# Altium PCB IRA.PcbDoc
Units mm, origin at the board's own origin, x right, y up, seen from the top; angles counter-clockwise.
Board outline 148 x 105 mm, 2 copper layers (Top Layer, Bottom Layer); 82 components, 62 nets, 302 pads, 34 vias.
Unrouted connection lines stored in the file: 1.
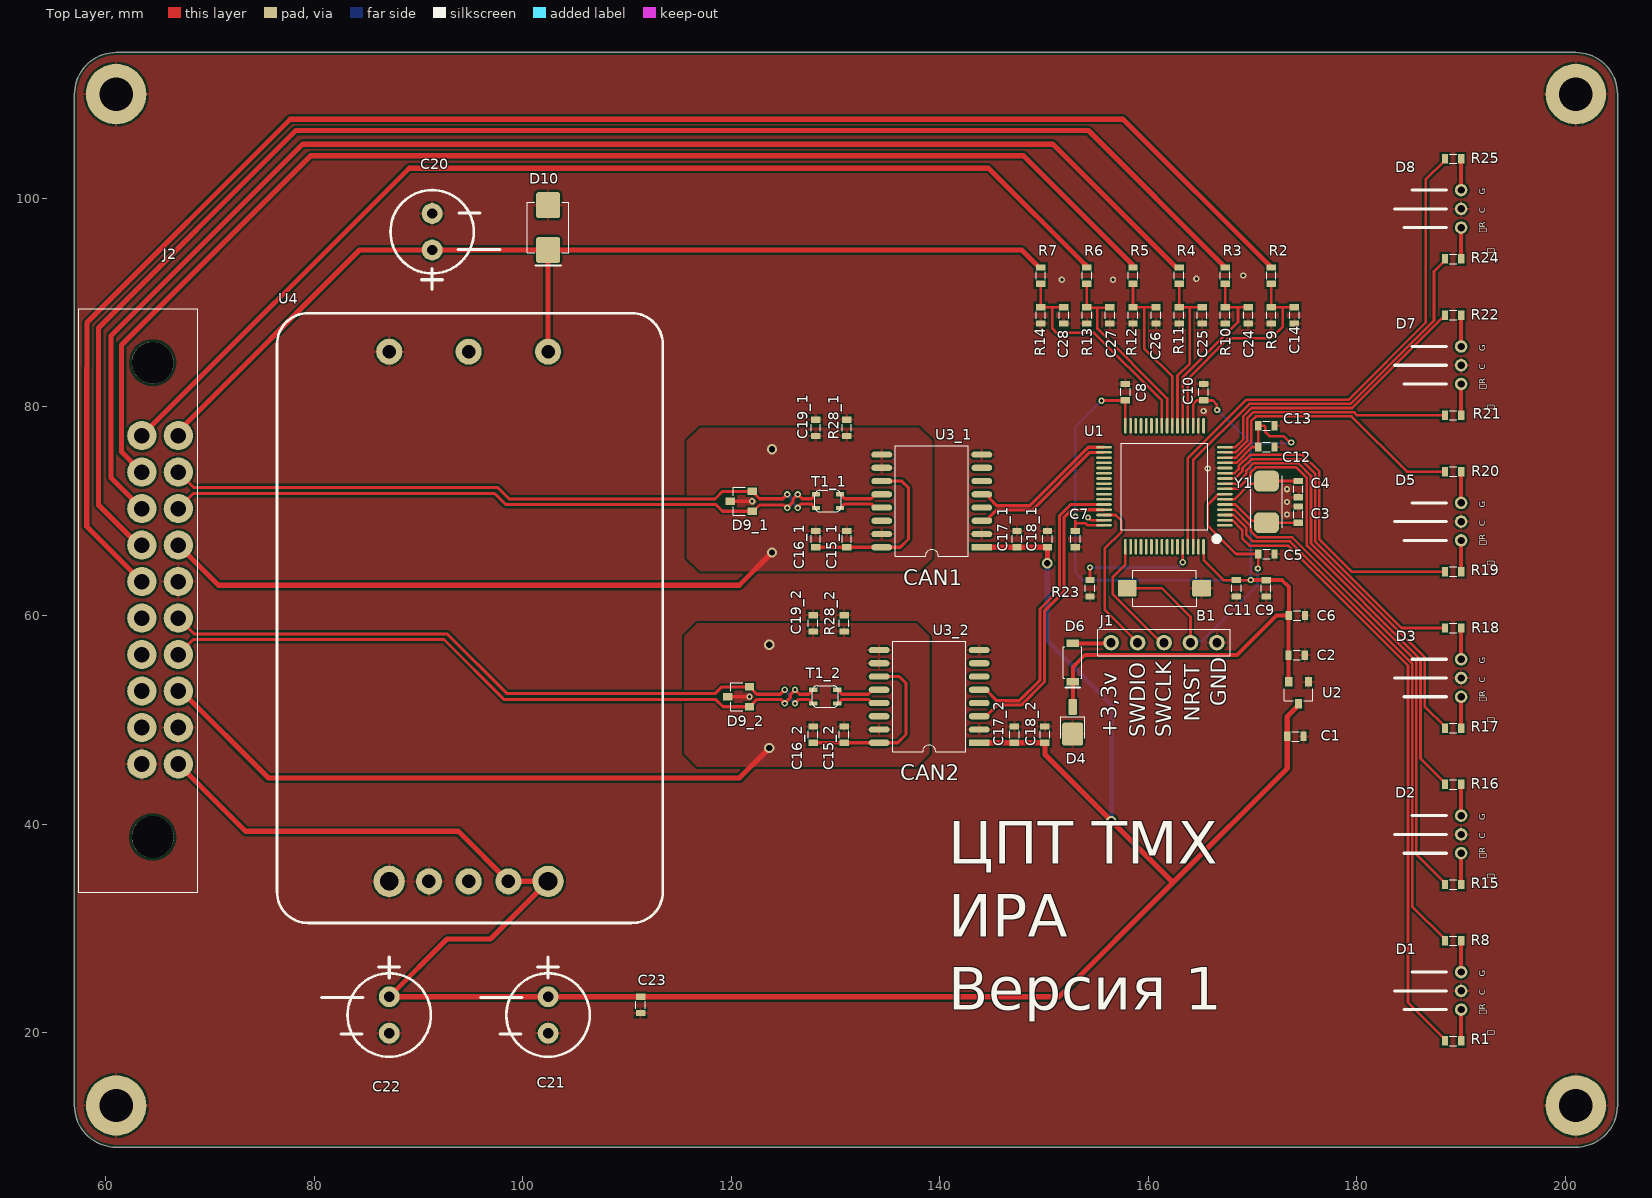
[diagram p0: Top Layer view]
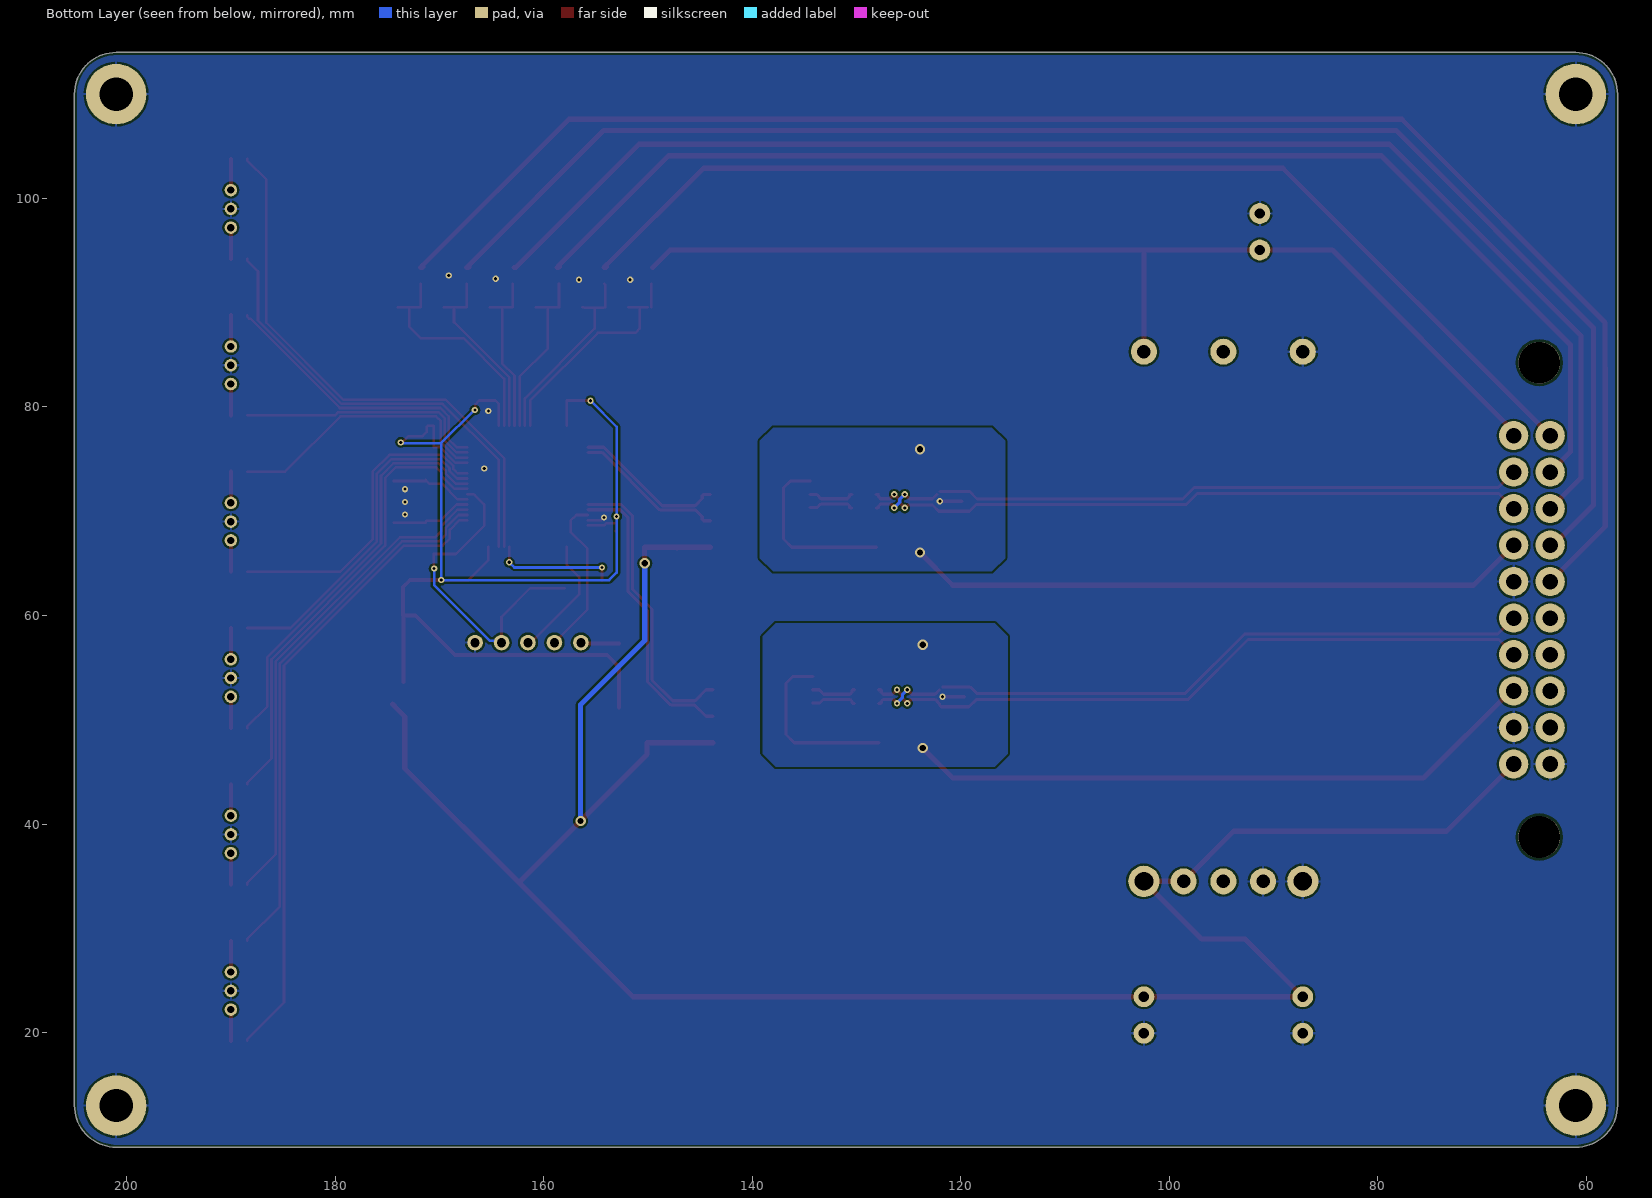
[diagram p1: Bottom Layer view, seen from below]
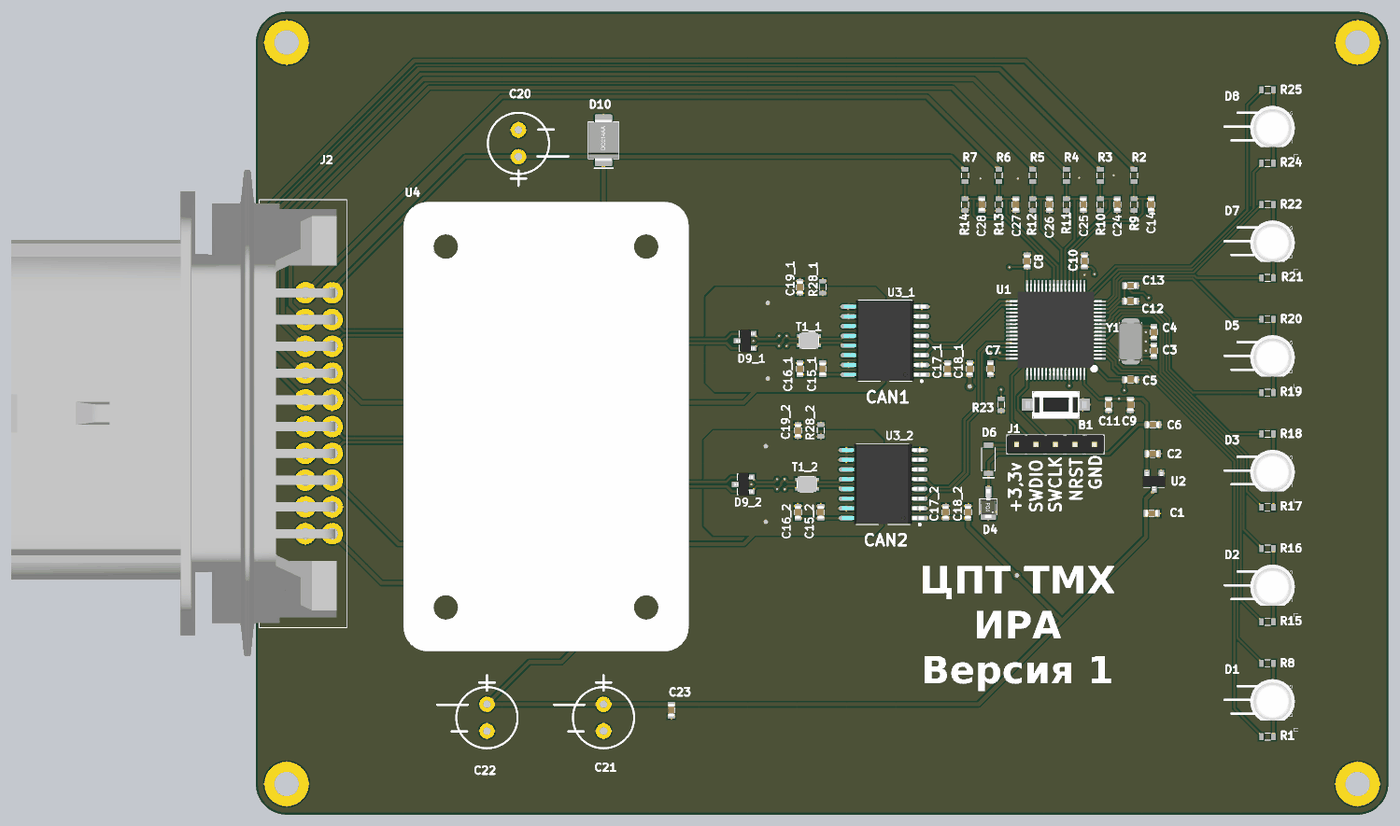
[diagram p2: 3D render of the assembled board from above, using the file's embedded part models]

## Layer stack, top to bottom
Top Solder: solder mask 0.0102, Solder Resist, Dk 3.5
Top Layer: signal copper 0.0356
Dielectric 1: dielectric 0.32, FR-4, Dk 4.8
Bottom Layer: signal copper 0.0356
Bottom Solder: solder mask 0.0102, Solder Resist, Dk 3.5

## Board outline
57,13 57,110 cw(c61,110) 61,114 201,114 cw(c201,110) 205,110 205,13 cw(c201,13) 201,9 61,9 cw(c61,13)

## Design rules (kind name [scope] priority, off if disabled: settings)
AcuteAngle [All] p1: minimum=3.50000000000000E+0001 checktracksonly=FALSE
BoardOutlineClearance "BoardOutlineClearance 1" [All] p1: gap=0.25 ignorepadtopadclearanceinfootprint=FALSE except(0: Arc-SplitContinuation Track-SplitContinuation SMDPad-SplitContinuation THPad-SplitContinuation Via-SplitContinuation Fill-SplitContinuation Poly-SplitContinuation Region-SplitContinuation Text-SplitContinuation) // Milling
Clearance "Clearance-1 1/2 Oz" [All] p1: gap=0.125 ignorepadtopadclearanceinfootprint=FALSE except(0.2: Arc-Fill Arc-Poly Track-Fill Track-Poly SMDPad-SMDPad SMDPad-Fill SMDPad-Poly THPad-Fill THPad-Poly Via-Fill Via-Poly Fill-Fill Fill-Poly Poly-Poly Poly-Region Poly-Text; 0.25: Arc-Hole Track-Hole SMDPad-Hole THPad-Hole Via-Hole Fill-Hole Poly-Hole Region-Hole Text-Hole) // Standart
ComponentClearance [All] p1: gap=0.1 collisioncheckmode=3 verticalgap=0.1 showdistances=FALSE
DiffPairsRouting "DiffPairsRouting 1/2 Oz" [All] p1: maxlimit=0.254 minlimit=0.125 mostfreqgap=0.254 toplayer_minwidth=0.125 toplayer_maxwidth=0.381 toplayer_prefwidth=0.381 bottomlayer_minwidth=0.125 bottomlayer_maxwidth=0.381 bottomlayer_prefwidth=0.381 maxuncoupledlength=12.7
HoleSize "Minimum HoleSize" [IsPad] p1: absolutevalues=TRUE maxlimit=5.9 minlimit=0.6 maxpercent=80.000 minpercent=20.000
HoleSize "Minimum HoleSize VIA 1" [IsVia] p2: absolutevalues=TRUE maxlimit=5.9 minlimit=0.3 maxpercent=80.000 minpercent=20.000 // Standart
HoleToHoleClearance Hole2HoleClearance [All] p1: gap=0.25 allowstackedmicrovias=FALSE
MinimumAnnularRing "Minimum AR VIA Standart" [All] p1: minimumring=0.15
MinimumAnnularRing "Minimum AR PAD Standart" [All] p2: minimumring=0.2
MinimumSolderMaskSliver "SolderMask Bridge Standart" [All] p1: minsoldermaskwidth=0.15 // All Masks
PlaneClearance "PlaneClearance-1 1/2 Oz" [All] p1: clearance=0.2 // Standart
PlaneConnect "TermalConnect-1 1/2 Oz" [All] p1: planeconnectstyle=Relief reliefexpansion=0.2 reliefentries=4 reliefconductorwidth=0.2 reliefairgap=0.2 // Standart
PolygonConnect "PolygonConnect-1 1/2 Oz" [All] p1: thpad.connectstyle=Relief thpad.reliefconductorwidth=0.254 thpad.reliefentries=4 thpad.polygonreliefangle="90 Angle" thpad.airgapwidth=0.2 smdpad.connectstyle=Relief smdpad.reliefconductorwidth=0.254 smdpad.reliefentries=4 smdpad.polygonreliefangle="90 Angle" smdpad.airgapwidth=0.2 via.connectstyle=Direct via.reliefconductorwidth=0.254 via.reliefentries=4 via.polygonreliefangle="90 Angle" via.airgapwidth=0.254 // Standart
RoutingCorners [All] p1 off: cornerstyle=45-Degree minsetback=2.54 maxsetback=2.54
RoutingVias [All] p1: holewidth=0.4 width=0.8 viastyle="Through Hole" minholewidth=0.3 minwidth=0.6 maxholewidth=5.9 maxwidth=8.9
SilkToSilkClearance Silk2SilkClearance [All] p1 off: silktosilkclearance=0.15
SilkToSolderMaskClearance Silk2SolderMaskClearance [IsPad] p1 off: minsilkscreentomaskgap=0.15 clearancetoexposedcopper=TRUE
SolderMaskExpansion SolderMaskExpansion-1 [All] p1: expansion=0.05 istentingtop=FALSE // Standart
UnRoutedNet [All] p1: checkbadconnections=TRUE
Width "Width 1/2 Oz" [All] p1: maxlimit=10 minlimit=0.125 preferedwidth=0.254 checkconnectedcopper=TRUE
19 further rules are at their usual default settings.

## Classes and differential pairs
channel class CAN: CAN1 CAN2
net class GND_CAN[1..2]: GND_CAN1 GND_CAN2
net class CAN_TX[1..2]: CAN_TX1 CAN_TX2
net class CAN_RX[1..2]: CAN_RX1 CAN_RX2
net class CAN_P[1..2]: CAN_P1 CAN_P2
net class CAN_N[1..2]: CAN_N1 CAN_N2
component class CAN2: C15_2 C16_2 C17_2 C18_2 C19_2 D9_2 R28_2 T1_2 U3_2
component class CAN1: C15_1 C16_1 C17_1 C18_1 C19_1 D9_1 R28_1 T1_1 U3_1
component class Main: C20 C21 C22 C23 D10 J2 U4
component class MCU: B1 C1 C2 C3 C4 C5 C6 C7 C8 C9 C10 C11 C12 C13 C14 C24 C25 C26 C27 C28 D1 D2 D3 D4 D5 D6 D7 D8 J1 R1 R2 R3 R4 R5 R6 R7 R8 R9 R10 R11 R12 R13 R14 R15 R16 R17 R18 R19 R20 R21 R22 R23 R24 R25 U1 U2 Y1

## Components (designator, comment, footprint, x,y, rotation, side; value= is the part's Value field where it differs from the comment)
B1 "But" "BUTTON 6x3.5" 165.106,62.611 r270 top
C1 "1uF" "0603 Capicator" 174.1,48.4 r180 top
C2 "1uF" "0603 Capicator" 174.23,56.2 r180 top
C3 "10pF" "0603 Capicator" 174.371,69.673 r90 top
C4 "10pF" "0603 Capicator" 174.371,72.113 r270 top
C5 "0.1uF" "0603 Capicator" 171.323,65.9 r0 top
C6 "4.7uF" "0603 Capicator" 174.25,60 r180 top
C7 "0.1uF" "0603 Capicator" 153,67.32 r90 top
C8 "0.1uF" "0603 Capicator" 157.794,81.425 r270 top
C9 "0.1uF" "0603 Capicator" 171.3,62.6 r90 top
C10 "0.1uF" "0603 Capicator" 165.294,81.425 r270 top
C11 "0.1uF" "0603 Capicator" 168.444,62.611 r90 top
C12 "10nF" "0603 Capicator" 171.323,76.157 r180 top
C13 "1uF" "0603 Capicator" 171.323,78.2 r180 top
C14 "4.7uF" "0603 Capicator" 174,88.792 r90 top
C15_1 "0.1uF" "0603 Capicator" 131.075,67.32 r270 top (schematic designator C15)
C15_2 "0.1uF" "0603 Capicator" 130.825,48.57 r270 top (schematic designator C15)
C16_1 "10uF" "0603 Capicator" 128.1,67.32 r270 top (schematic designator C16)
C16_2 "10uF" "0603 Capicator" 127.85,48.57 r270 top (schematic designator C16)
C17_1 "0.1uF" "0603 Capicator" 147.4,67.32 r270 top (schematic designator C17)
C17_2 "0.1uF" "0603 Capicator" 147.15,48.57 r270 top (schematic designator C17)
C18_1 "10uF" "0603 Capicator" 150.325,67.32 r270 top (schematic designator C18)
C18_2 "10uF" "0603 Capicator" 150.075,48.57 r270 top (schematic designator C18)
C19_1 "1nF" "0603 Capicator" 128.1,78 r270 top (schematic designator C19)
C19_2 "1nF" "0603 Capicator" 127.85,59.25 r270 top (schematic designator C19)
C20 "120uF" "Bar Cap 8 mm" 91.31,96.8 r0 top
C21 "470uF" "Bar Cap 8 mm" 102.43,21.676 r180 top
C22 "470uF" "Bar Cap 8 mm" 87.19,21.676 r180 top
C23 "1uF" "0603 Capicator" 111.3,22.646 r90 top
C24 "4.7uF" "0603 Capicator" 169.578,88.792 r90 top
C25 "4.7uF" "0603 Capicator" 165.156,88.792 r90 top
C26 "4.7uF" "0603 Capicator" 160.734,88.792 r90 top
C27 "4.7uF" "0603 Capicator" 156.312,88.792 r90 top
C28 "4.7uF" "0603 Capicator" 151.89,88.792 r90 top
D1 "LED RG" "LED TYPE 5mm" 190,24 r90 top
D2 "LED RG" "LED TYPE 5mm" 190,39 r90 top
D3 "LED RG" "LED TYPE 5mm" 190,54 r90 top
D4 "TVS 3.3V" DO-216AA 152.737,49.725 r90 top
D5 "LED RG" "LED TYPE 5mm" 190,69 r90 top
D6 "Diode" sod-123 152.75,57.33 r270 top
D7 "LED RG" "LED TYPE 5mm" 190,84 r90 top
D8 "LED RG" "LED TYPE 5mm" 190,99 r90 top
D9_1 "TVS" SOT-23 122,70 r90 top (schematic designator D9)
D9_2 "TVS" SOT-23 121.75,51.25 r90 top (schematic designator D9)
D10 "TVS 80V" SMB 102.43,97.2 r270 top
J1 "PLS 5x1" "PLS 5x1" 166.58,57.4 r180 top
J2 "MX150 10x2" "Conn2x10 (Molex)" 64.5,61.5 r270 top
R1 "200R" "0603 Resistor" 189.22,19.2 r0 top
R2 "3.3k" "0603 Resistor" 171.789,92.602 r270 top
R3 "10k" "0603 Resistor" 167.367,92.602 r90 top
R4 "12k" "0603 Resistor" 162.945,92.602 r90 top
R5 "16k" "0603 Resistor" 158.523,92.602 r90 top
R6 "24k" "0603 Resistor" 154.101,92.602 r90 top
R7 "20k" "0603 Resistor" 149.679,92.602 r90 top
R8 "200R" "0603 Resistor" 189.22,28.8 r0 top
R9 "1k" "0603 Resistor" 171.789,88.792 r90 top
R10 "1k" "0603 Resistor" 167.367,88.792 r90 top
R11 "1k" "0603 Resistor" 162.945,88.792 r90 top
R12 "1k" "0603 Resistor" 158.523,88.792 r90 top
R13 "1k" "0603 Resistor" 154.101,88.792 r90 top
R14 "680R" "0603 Resistor" 149.679,88.792 r90 top
R15 "200R" "0603 Resistor" 189.22,34.2 r0 top
R16 "200R" "0603 Resistor" 189.22,43.8 r0 top
R17 "200R" "0603 Resistor" 189.22,49.2 r0 top
R18 "200R" "0603 Resistor" 189.22,58.8 r0 top
R19 "200R" "0603 Resistor" 189.22,64.2 r0 top
R20 "200R" "0603 Resistor" 189.22,73.8 r0 top
R21 "200R" "0603 Resistor" 189.22,79.2 r0 top
R22 "200R" "0603 Resistor" 189.22,88.8 r0 top
R23 "3.9k" "0603 Resistor" 154.4,62.611 r270 top
R24 "200R" "0603 Resistor" 189.22,94.2 r0 top
R25 "200R" "0603 Resistor" 189.22,103.8 r0 top
R28_1 "1M" "0603 Resistor" 131.075,78 r270 top (schematic designator R28)
R28_2 "1M" "0603 Resistor" 130.825,59.25 r270 top (schematic designator R28)
T1_1 "ACM2520" ACM2520 128.125,71.62 r0 top (schematic designator T1)
T1_2 "ACM2520" ACM2520 127.875,52.87 r0 top (schematic designator T1)
U1 "STM32F105RCT6" LQFP64 161.544,72.39 r180 top
U2 "LDO 3V" SOT-23 175.35,53.63 r180 top
U3_1 "CAN Tranciever" SOIC16W 139.215,70.9 r180 top (schematic designator U3)
U3_2 "CAN Tranciever" SOIC16W 138.965,52.15 r180 top (schematic designator U3)
U4 "DC/DC 80/5" VDRW50 102.43,85.3 r270 top
Y1 "8MHz" NX5032GA 171.323,70.893 r270 top

## Footprints (in the part's own frame and the unit in brackets; to place one, negate y for a bottom-side part, rotate by r counter-clockwise, add the part's x,y. Pads: shape width x height; smd on the part's side, far side on the other; paste and mask are expansions set on the pad)
"0603 Capicator" [mm]
  rect 0.6x0.9 smd: 1(-0.78,0) 2(0.78,0)
  silkscreen extent -0.35,-0.45 0.35,0.45, body extent -0.82,-0.45 0.88,0.45, height 0.9
"0603 Resistor" [mm]
  rect 0.6x0.9 smd: 1(-0.78,0) 2(0.78,0)
  silkscreen extent -0.35,-0.45 0.35,0.45, body extent -0.85,-0.45 0.85,0.45, height 0.55
ACM2520 [mm]
  rect 0.8x0.4 smd: 1(0,-1.3) 2(2.3,-1.3) 3(0,0) 4(2.3,0)
  silkscreen extent -0.13,-1.68 2.4,0.38, body extent -0.11,-1.64 2.39,0.36, height 1.24
"Bar Cap 8 mm" [mm]
  round 2 hole 1: 1(0,1.75) 2(0,-1.75)
  silkscreen extent -4,-5.55 6.5,4
"BUTTON 6x3.5" [mm]
  rrect20% 1.6x1.8 smd: 1(0,0) 2(0,-7.125)
  silkscreen extent -1.75,-6.63 1.75,-0.48, body extent -1.75,-7.52 1.75,0.48, height 4.3
"Conn2x10 (Molex)" [mm]
  round 2.8 hole 1.5: 1(-15.75,2.46) 2(-12.25,2.46) 3(-8.75,2.46) 4(-5.25,2.46) 5(-1.75,2.46) 6(1.75,2.46) 7(5.25,2.46) 8(8.75,2.46) 9(12.25,2.46) 10(15.75,2.46) 11(-15.75,-1.04) 12(-12.25,-1.04) 13(-8.75,-1.04) 14(-5.25,-1.04) 15(-1.75,-1.04) 16(1.75,-1.04) 17(5.25,-1.04) 18(8.75,-1.04) 19(12.25,-1.04) 20(15.75,-1.04)
  round 4 hole 4: B(-22.75,0) B(22.75,0)
  silkscreen extent -27.92,-7.07 28.05,4.35, body extent -31.85,-39.52 31.85,3.04, height 21.43
DO-216AA [mm]
  rrect20% 2.2x2 smd: 1(-1.1,0)
  rrect20% 1.5x0.8 smd: 2(1.5,0)
  silkscreen extent -1.5,-1.15 0.58,1.15, body extent -1.91,-0.93 1.85,0.98, height 1.02
"LED TYPE 5mm" [mm]
  round 1.2 hole 0.7: 1(-1.8,0) 2(0,0) 3(1.8,0)
  silkscreen extent -1.8,1.4 1.8,6.4, body extent -2.7,-2.8 2.71,3.05, height 11.65
LQFP64 [mm]
  oval 1.5x0.254 smd paste+0 mask+0.02: 1(-5.8,3.75) 2(-5.8,3.25) 3(-5.8,2.75) 4(-5.8,2.25) 5(-5.8,1.75) 6(-5.8,1.25) 7(-5.8,0.75) 8(-5.8,0.25) 9(-5.8,-0.25) 10(-5.8,-0.75) 11(-5.8,-1.25) 12(-5.8,-1.75) 13(-5.8,-2.25) 14(-5.8,-2.75) 15(-5.8,-3.25) 16(-5.8,-3.75) 33(5.8,-3.75) 34(5.8,-3.25) 35(5.8,-2.75) 36(5.8,-2.25) 37(5.8,-1.75) 38(5.8,-1.25) 39(5.8,-0.75) 40(5.8,-0.25) 41(5.8,0.25) 42(5.8,0.75) 43(5.8,1.25) 44(5.8,1.75) 45(5.8,2.25) 46(5.8,2.75) 47(5.8,3.25) 48(5.8,3.75)
  oval 0.254x1.5 smd paste+0 mask+0.02: 17(-3.75,-5.8) 18(-3.25,-5.8) 19(-2.75,-5.8) 20(-2.25,-5.8) 21(-1.75,-5.8) 22(-1.25,-5.8) 23(-0.75,-5.8) 24(-0.25,-5.8) 25(0.25,-5.8) 26(0.75,-5.8) 27(1.25,-5.8) 28(1.75,-5.8) 29(2.25,-5.8) 30(2.75,-5.8) 31(3.25,-5.8) 32(3.75,-5.8) 49(3.75,5.8) 50(3.25,5.8) 51(2.75,5.8) 52(2.25,5.8) 53(1.75,5.8) 54(1.25,5.8) 55(0.75,5.8) 56(0.25,5.8) 57(-0.25,5.8) 58(-0.75,5.8) 59(-1.25,5.8) 60(-1.75,5.8) 61(-2.25,5.8) 62(-2.75,5.8) 63(-3.25,5.8) 64(-3.75,5.8)
  silkscreen extent -5.2,-4.15 4.15,5.25, body extent -6,-6.02 6,5.98, height 1.56
NX5032GA [mm] "Crystal"
  rrect50% 2x2.4 smd: 1(-2,0) 2(2,0)
  silkscreen extent -2.5,-1.5 2.5,1.5, body extent -2.5,-1.6 2.5,1.6, height 1.5
"PLS 5x1" [mm] "Connector; Header; 5 Position"
  round 1.5 hole 0.9: 1(0,0) 2(2.54,0) 3(5.08,0) 4(7.62,0) 5(10.16,0)
  silkscreen extent -1.27,-1.27 11.43,1.27, body extent -1.28,-1.28 11.42,1.26, height 8.54
SMB [mm]
  rrect20% 2.5x2.3 smd: 1(-2.15,0) 2(2.15,0)
  silkscreen extent -2.42,-2 3.65,2, body extent -2.79,-1.97 2.79,1.97, height 2.65
sod-123 [mm]
  rect 0.7x1.2 smd: 1(0,0) 2(3.7,0)
  silkscreen extent 0.35,-0.9 4.25,0.87, body extent 0,-0.8 3.7,0.8
SOIC16W [mm]
  rect 2x0.6 smd: 1(-4.81,4.36)
  oval 2x0.6 smd: 2(-4.81,3.09) 3(-4.81,1.82) 4(-4.81,0.55) 5(-4.81,-0.72) 6(-4.81,-1.99) 7(-4.81,-3.26) 8(-4.81,-4.53) 9(4.79,-4.53) 10(4.79,-3.26) 11(4.79,-1.99) 12(4.79,-0.72) 13(4.79,0.55) 14(4.79,1.82) 15(4.79,3.09) 16(4.79,4.36)
  round 0.5 on Top Overlay mask+0.051: ""(-4.8,5.2)
  silkscreen extent -3.5,-5.39 3.48,5.21, body extent -5.35,-5.35 5.35,5.15, height 2.65
SOT-23 [mm]
  rect 0.7x0.9 smd: 1(0,0) 2(1.9,0) 3(0.95,2.1)
  silkscreen extent -0.4,0.65 2.3,1.83, body extent -0.55,-0.17 2.45,2.23, height 1.1
VDRW50 [mm]
  round 2.5 hole 1.3: 1(0,0) 2(0,-7.62) 3(0,-15.24) 5(50.8,-11.43) 6(50.8,-7.62) 7(50.8,-3.81)
  round 3 hole 1.8: 4(50.8,-15.24) 8(50.8,0)
  silkscreen extent -3.7,-26 54.8,11, body extent -3.6,-25.92 54.8,10.88, height 12.8

## Part data
B1: library part "Button 2 Conn", "Button 2 Conn SMD", Manufacturer="KLS electronic co ltd", Part Number=L-KLS7-TS3608-5.0-180, ComponentLink1Description=Chip&Dip, ComponentLink1URL=https://www.chipdip.ru/product/kls7-ts3608-5.0-180-td-02xa, Type=Button
C1 C2 C13 C23: library part "Cap 1uF (0603)", "1uF X5R 25V 10% 0603", Manufacturer="Murata Manufacturing", Part Number=GRM188R61E105KAADD, ComponentLink1Description=Chip&Dip, ComponentLink1URL=https://www.chipdip.ru/product/grm188r61e105k, Type=Capacitor
C3 C4: library part "Cap 10pF (0603)", "10pF NP0 50V 5% 0603", Manufacturer="Murata Manufacturing", Part Number=GRM1885C1H100JA01D, ComponentLink1Description=Chip&Dip, ComponentLink1URL=https://www.chipdip.ru/product/grm1885c1h100j, Type=Capacitor
C5 C7 C8 C9 C10 C11 C15_1 C15_2 C17_1 C17_2: library part "Cap 0.1uF (0603)", "0.1uF X7R 16V 10% 0603", Manufacturer="Murata Manufacturing", Part Number=GRM188R71C104KA01D, ComponentLink1Description=Chip&Dip, ComponentLink1URL=https://www.chipdip.ru/product/grm188r71c104ka01d, Type=Capacitor
C6 C14 C24 C25 C26 C27 C28: library part "Cap 4.7uF (0603)", "4.7uF X5R 25V 10% 0603", Manufacturer="Murata Manufacturing", Part Number=GRM188R61E475KE11D, ComponentLink1Description=Chip&Dip, ComponentLink1URL=https://www.chipdip.ru/product0/9000348448, Type=Capacitor
C12: library part "Cap 10nF (0603)", "10nF X7R  100V 10% 0603", Manufacturer="Murata Manufacturing", Part Number=GRM188R72A103KA01D, ComponentLink1Description=Chip&Dip, ComponentLink1URL=https://www.chipdip.ru/product/grm188r72a103ka01d, Type=Capacitor
C16_1 C16_2 C18_1 C18_2: library part "Cap 10uF (0603)", "10uF X5R 25V 20% 0603", Manufacturer="Murata Manufacturing", Part Number=GRM188R61E106M, ComponentLink1Description=Chip&Dip, ComponentLink1URL=https://www.chipdip.ru/product/grm188r61e106m, Type=Capacitor
C19_1 C19_2: library part "Cap 1nF (0603)", "X7R 1nF 100V 10% 0603", Manufacturer="Murata Manufacturing", Part Number=GRM188R72A102KA01D, ComponentLink1Description=Chip&Dip, ComponentLink1URL=https://www.chipdip.ru/product/grm188r72a102ka01d, Type=Capacitor
C20: library part "Cap Pol 120uF", "Polymer capacitor with low E.S.R. Rated voltage - 80V.", Manufacturer=Matsushita, PartNumber=EEU-FS1K121LB, ComponentLink1Description=ChipDip, ComponentLink1URL=https://www.chipdip.ru/product0/8001968680, Type=Capacitor
C21 C22: library part "Cap Pol 470uF", "Polymer capacitor with low E.S.R. Rated voltage - 6.3V.", Manufacturer=Panosonic, PartNumber=6SEPC470MX, ComponentLink1Description=ChipDip, ComponentLink1URL=https://www.chipdip.ru/product0/8005164678, ComponentLink2Description=Datasheet, ComponentLink2URL=https://static.chipdip.ru/lib/499/DOC016499978.pdf, Type=Capacitor
D1 D2 D3 D5 D7 D8: library part "Led RG", "5mm ROUND TYPE RG LED, CAMMON CATHODE", Part Number=L-59EGW, ComponentLink1Description=ChipDip, ComponentLink1URL=https://www.chipdip.ru/product/l-59egw, Type=Diode
D4: library part "TVS Diode 3.3V [SM2T]", "High peak pulse power: 200 W (10/1000 μs)", Manufacturer=STMicroelectronics, Part Number=SM2T3V3A, ComponentLink1Description=DataSheet, ComponentLink1URL=https://www.st.com/resource/en/datasheet/sm2t3v3a.pdf, ComponentLink2Description=Chip&Dip, ComponentLink2URL=https://www.chipdip.ru/product0/8283670575, Type=Diode
D6: library part "Diode Schottky (SOD-123)", "0.5 A, Low Forward Voltage less than 385 mV, 400 mW Power Dissipation Package", Manufacturer="ON Semiconductor", Part Number=MBR0520L, ComponentLink1Description=DataSheet, ComponentLink1URL=http://www.farnell.com/datasheets/1875336.pdf, ComponentLink2Description=Chip&Dip, ComponentLink2URL=https://www.chipdip.ru/product/mbr0520l, Type=Diode
D9_1 D9_2: library part "TVS Diode Arrays", "The SM24CANB TVS Diode Array is designed to protect automotive Controller Area Network (CAN) lines from damage due to electrostatic discharge (ESD), electrical fast transient (EFT), and other overvoltage transients.", Manufacturer=Littelfuse, Part Number=SM24CANB-02HTG, ComponentLink1Description=DataSheet, ComponentLink1URL=https://m.littelfuse.com/~/media/electronics/datasheets/tvs_diode_arrays/littelfuse_tvs_diode_array_sm24canb_datasheet.pdf.pdf, ComponentLink2Description=Chip&Dip, ComponentLink2URL=https://www.chipdip.ru/product1/8001779022, Type=Diode
D10: library part "TVS Diode 80V [SMBJ]", "600W", Manufacturer=STMicroelectronics, Part Number=SMBJ160A, ComponentLink1Description=DataSheet, ComponentLink1URL=https://static.chipdip.ru/lib/666/DOC017666196.pdf, Type=Diode
J1: library part "Conn 5 (PLS)", "Header, 5-Pin"
J2: library part "Conn 20 [MX150]", "Dual Row Right-Angle Header, 20 Circuits, Keying Option C, Dark Gray, Solder Tail", Manufacturer=Molex, Part Number=348302003, ComponentLink2Description=Datasheet, ComponentLink2URL=https://www.molex.com/pdm_docs/as/AS-34829-001-001.pdf, Type=Connector
R1 R8 R15 R16 R17 R18 R19 R20 R21 R22 R24 R25: library part "Res 200R (0603)", "0.1W 0603 200R, 1%", Manufacturer=Taiwan, Part Number=RC0603FR-07200RL, ComponentLink1Description=Chip&Dip, ComponentLink1URL=https://www.chipdip.ru/product0/9000079623, Type=Resistor
R2: library part "Res 3.3k (0603)", "0.1W 0603 3.3k, 1%", Manufacturer=Taiwan, Part Number=RC0603FR-073K3L, ComponentLink1Description=Chip&Dip, ComponentLink1URL=https://www.chipdip.ru/product0/9000079724, Type=Resistor
R3: library part "Res 10k (0603)", "0.1W 0603 10k, 1%", Manufacturer=Taiwan, Part Number=RC0603FR-0710KL, ComponentLink1Description=Chip&Dip, ComponentLink1URL=https://www.chipdip.ru/product0/9000079736, Type=Resistor
R4: library part "Res 12k (0603)", "0.1W 0603 12k, 1%", Manufacturer=Taiwan, Part Number=RC0603FR-0712KL, ComponentLink1Description=Chip&Dip, ComponentLink1URL=https://www.chipdip.ru/product0/9000079738, Type=Resistor
R5: library part "Res 16k (0603)", "0.1W 0603 16k, 1%", Manufacturer=Taiwan, Part Number=RC0603FR-0716KL, ComponentLink1Description=Chip&Dip, ComponentLink1URL=https://www.chipdip.ru/product/0.1w-0603-16-kom-1, Type=Resistor
R6: library part "Res 24k (0603)", "0.1W 0603 24k, 1%", Manufacturer=Taiwan, Part Number=RC0603FR-0724KL, ComponentLink1Description=Chip&Dip, ComponentLink1URL=https://www.chipdip.ru/product/0.1w-0603-24-kom-1, Type=Resistor
R7: library part "Res 20k (0603)", "0.1W 0603 10k, 1%", Manufacturer=Taiwan, Part Number=RC0603FR-0720KL, ComponentLink1Description=Chip&Dip, ComponentLink1URL=https://www.chipdip.ru/product0/9000079743, Type=Resistor
R9 R10 R11 R12 R13: library part "Res 1k (0603)", "0.1W 0603 1k, 1%", Manufacturer=Taiwan, Part Number=RC0603FR-071KL, ComponentLink1Description=Chip&Dip, ComponentLink1URL=https://www.chipdip.ru/product0/9000079676, Type=Resistor
R14: library part "Res 680R (0603)", "0.1W 0603 680R, 1%", Manufacturer=Taiwan, Part Number=RC0603FR-07680RL, ComponentLink1Description=Chip&Dip, ComponentLink1URL=https://www.chipdip.ru/product0/9000079672, Type=Resistor
R23: library part "Res 3.9k (0603)", "0.1W 0603 3.9k, 1%", Manufacturer=Taiwan, Part Number=RC0603FR-073K9L, ComponentLink1Description=Chip&Dip, ComponentLink1URL=https://www.chipdip.ru/product0/9000079726, Type=Resistor
R28_1 R28_2: library part "Res 1M (0603)", "0.1W 0603 1M, 1%", Manufacturer=Taiwan, Part Number=RC0603FR-071ML, ComponentLink1Description=Chip&Dip, ComponentLink1URL=https://www.chipdip.ru/product0/9000079784, Type=Resistor
T1_1 T1_2: "Common mode filters / Automotive signal line (for power train/safety)", Manufacturer=TDK, Part Number=ACM2520-301-2P-T002, ComponentLink1Description=DataSheet, ComponentLink1URL=https://product.tdk.com/system/files/dam/doc/product/emc/emc/cmf_cmc/catalog/cmf_commercial_signal_acm2520_en.pdf, ComponentLink2Description=ChipDip, ComponentLink2URL=https://www.chipdip.ru/product0/8008480337?ysclid=lw4t4jsj9a923851487, Type=Inductor
U1: "MCU ARM 256KB FLASH MEM 64-LQFP", Manufacturer=STMicroelectronics, ComponentLink1Description=DataSheet, ComponentLink1URL=https://static.chipdip.ru/lib/375/DOC011375072.pdf, ComponentLink2Description=Chip&Dip, ComponentLink2URL=https://www.chipdip.ru/product/stm32f105rct6, Part Number=STM32F105RCT6, Type=IC
U2: library part "LDO 3,3V [MCP]", "MCP1702 Low Dropout Voltage Regulator. The input operating range is specifiedfrom 2.7V to 13.2V", Manufacturer=Microchip, Part Number=MCP1702T-3002E/CB, ComponentLink1Description=DataSheet, ComponentLink1URL=https://static.chipdip.ru/lib/986/DOC003986671.pdf, ComponentLink2Description=Chip&Dip, ComponentLink2URL=https://www.chipdip.ru/product/mcp1702t-3002e-cb-microchip
U3_1 U3_2: library part TDA51SCANHC, "Isolated CAN Tranciever", Manufacturer="Mornsun Power", ComponentLink1Description=ChipDip, ComponentLink1URL=https://www.chipdip.ru/product0/8024219767, ComponentLink2Description=Datasheet, ComponentLink2URL=https://static.chipdip.ru/lib/623/DOC041623283.pdf, Part Number=TDA51SCANHC, Type=IC
U4: library part VDRW50N5, "DC/DC converter by railway standart 80/5 50W", Manufacturer=Voltbricks, ComponentLink2Description=Datasheet, ComponentLink2URL=https://support.voltbricks.ru/datasheets/VDRW50.pdf, Part Number=VDRW50N5, Type=IC
Y1: library part "Crystal 8MHz", "Crystal NX5032GA", Manufacturer="Nihon Dempa Kogio (NDK)", Part Number=NX5032GA-8MHz, ComponentLink1Description=Chip&Dip, ComponentLink1URL=https://www.chipdip.ru/product0/9000523954, Type=Crystal

## Free pads (board coordinates)
  round 5.8 hole 3.2: 0(61,13) 0(61,110) 0(201,13) 0(201,110)

## Via types
v1: diameter 0.6, hole 0.3, Top Layer to Bottom Layer, tented both sides, 28 vias
v2: diameter 1, hole 0.6, Top Layer to Bottom Layer, tented both sides, 6 vias

## Nets (pads, with @x,y where several pads share a name; then routed paths per layer and width w, separated by ;. In a path a pad name is that pad's centre, name@x,y a point inside that pad or via, vN(x,y) a via of type N, cw(c..) or ccw(c..) an arc to the next point about the centre after c; other vN are vias at no path point)
+3,3V: C2.2 C6.2 C7.2 C8.2 C9.2 C10.2 C11.2 C12.2 C13.2 D4.2 D6.2 U1.13 U1.19 U1.32 U1.48 U1.64 U2.2 | length 126.7
  Top Layer w0.25: v1(153,69.5) 153,68.85 ; C7.2@153.1,68.1 153,68.2 153,68.85 ; v1(155.5,80.6) 155.522,80.622 157.771,80.622 C8.2 U1.32 ; U1.48 154.16,68.64 153.95,68.85 153,68.85 ; U1.19 164.294,80.299 164.615,80.621 165.27,80.621 C10.2 ; U1.64 165.294,65.306 167.209,63.391 C11.2 v1(169.822,63.391) ; C10.2@165.294,80.622 166.178,80.622 166.552,80.248 166.552,79.748 v1(166.6,79.7) ; U1.13 168.44,74.64 169.957,76.157 C12.2 ; C12.2@170.521,76.178 170.521,78.2 C13.2 171.072,78.2 171.218,78.054 171.218,77.582 171.6,77.2 172.979,77.2 173.579,76.6 v1(173.7,76.6)
  Top Layer w0.381: D4.2@152.75,51.149 152.75,55.05 153.9,56.2 168.5,56.2 172.3,60 C6.2 ; v1(169.822,63.391) 169.828,63.385 171.295,63.385 C9.2 ; C9.2@171.343,63.38 172.81,63.38 173.47,62.72 C6.2 ; U2.2 173.45,55.25 C2.2 173.46,56.21 173.46,59.99 C6.2
  Bottom Layer w0.25: v1(155.5,80.6) 153,78.1 v1(153,69.5) 153,64.1 153.709,63.391 v1(169.822,63.391) 169.822,76.522 ; v1(166.6,79.7) 166.644,79.7 169.822,76.522 ; v1(173.7,76.6) 173.622,76.522 169.822,76.522
+5V: C1.2 C17_1.2 C17_2.2 C18_1.2 C18_2.2 C21.2 C22.2 C23.2 J2.10 U2.3 U3_1.1 U3_2.1 U4.7 U4.8 | length 221.8
  Top Layer w0.5: J2.10 73.41,39.3 93.82,39.3 U4.7 U4.8 96.893,28.963 92.727,28.963 C22.2 C21.2 C23.2 151.426,23.426 162.375,34.375 ; U3_2.1 C17_2.2 C18_2.2 150.075,46.675 162.375,34.375 ; U3_1.1 C17_1.2@147.25,66.54 ; C17_1.2@147.2,66.49 C17_1.2@147.25,66.54 ; v2(150.3,65) 150.312,65.012 150.312,66.528 C18_1.2 C17_1.2 C17_1.2@147.25,66.54 ; U2.3@174.5,51.522 174.492,51.522 174.3,51.33 174.3,51.3 173.32,50.32 C1.2 173.32,45.32 162.375,34.375
  Bottom Layer w0.5: v2(150.3,65) 150.3,57.6 156.46,51.44 v2(156.46,40.29)
+72V: C20.2 D10.2 J2.1 R7.2 U4.1 | length 101.6
  Top Layer w0.5: J2.1@67.15,76.19 67.15,77.85 84.35,95.05 C20.2 D10.2 ; U4.1 D10.2 ; R7.2@149.529,93.382 147.861,95.05 D10.2
BOOT: R23.1 U1.60 | length 11.8
  Top Layer w0.25: R23.1 v1(154.4,64.6) ; U1.60@163.295,66.589 163.295,65.88 163.3,65.875 v1(163.3,65.1)
  Bottom Layer w0.25: v1(154.4,64.6) 162.8,64.6 v1(163.3,65.1)
CAN_N1: D9_1.1 J2.3 T1_1.3 | length 64
  Top Layer w0.3: J2.3 68.41,71.7 97.3,71.7 98.35,70.65 118.506,70.65 119.156,70 122.1,70 122.7,70.6 125.045,70.6 125.324,70.32 v1(125.37,70.32) 125.9,70.85 125.9,71.15 v1(126.37,71.62) 126.79,71.2 127.699,71.2 127.875,71.376 127.875,71.57 127.925,71.62 T1_1.3
CAN_N2: D9_2.1 J2.7 T1_2.3 | length 65.9
  Top Layer w0.3: J2.7 68.41,57.7 92.45,57.7 98.218,51.932 118.518,51.932 119.2,51.25 121.85,51.25 122.05,51.45 122.05,51.55 122.45,51.95 124.74,51.95 v1(125.12,51.57) 125.65,52.1 125.65,52.4 v1(126.12,52.87) 126.54,52.45 127.449,52.45 127.625,52.626 127.625,52.82 127.675,52.87 T1_2.3
CAN_P1: D9_1.2 J2.2 T1_1.1 | length 63.7
  Top Layer w0.3: J2.2 68.435,72.275 97.6,72.275 98.7,71.175 118.431,71.175 119.156,71.9 D9_1.2 ; D9_1.2@122.3,71.6 122.7,71.2 124.945,71.2 125.365,71.62 v1(125.37,71.62) ; v1@126.365,70.34 126.725,70.7 127.669,70.7 127.875,70.494 127.875,70.37 127.925,70.32 T1_1.1
  Bottom Layer w0.3: v1(125.37,71.62) 125.841,71.15 125.841,70.85 v1(126.37,70.32)
CAN_P2: D9_2.2 J2.6 T1_2.1 | length 65.3
  Top Layer w0.3: J2.6 68.485,58.225 92.75,58.225 98.45,52.525 118.475,52.525 119.1,53.15 D9_2.2 ; D9_2.2@122.05,52.85 122.45,52.45 124.695,52.45 125.115,52.87 v1(125.12,52.87) ; v1@126.115,51.59 126.475,51.95 127.419,51.95 127.625,51.744 127.625,51.62 127.675,51.57 T1_2.1
  Bottom Layer w0.3: v1(125.12,52.87) 125.591,52.4 125.591,52.1 v1(126.12,51.57)
CAN_RX1: U1.33 U3_1.5 | length 14.7
  Top Layer w0.3: U3_1.5 144.644,71.62 144.782,71.482 144.782,71.218 145.475,70.525 148.625,70.525 154.24,76.14 U1.33
CAN_RX2: U1.44 U3_2.5 | length 28.3
  Top Layer w0.3: U3_2.5 144.43,52.87 145.475,51.825 147.625,51.825 149.6,53.8 149.6,60.625 151.475,62.5 151.475,69.575 152.54,70.64 U1.44
CAN_TX1: U1.34 U3_1.3 | length 14.6
  Top Layer w0.3: U3_1.3 144.644,69.08 144.782,69.219 144.782,69.482 145.4,70.1 148.85,70.1 154.39,75.64 U1.34
CAN_TX2: U1.45 U3_2.3 | length 28.3
  Top Layer w0.3: U3_2.3 144.43,50.33 145.5,51.4 147.801,51.4 150.025,53.624 150.025,60.411 151.9,62.286 151.9,69.375 152.665,70.14 U1.45
GND: B1.1 C1.1 C2.1 C3.2 C4.2 C5.2 C6.1 C7.1 C8.1 C9.1 C10.1 C11.1 C12.1 C13.1 C14.1 C17_1.1 C17_2.1 C18_1.1 C18_2.1 C19_1.1 C19_2.1 C20.1 C21.1 C22.1 C23.1 C24.1 C25.1 C26.1 C27.1 C28.1 D1.2 D2.2 D3.2 D4.1 D5.2 D7.2 D8.2 D10.1 J1.1 J2.5 J2.9 J2.20 pad.0 R9.1 R10.1 R11.1 R12.1 R13.1 R14.1 R23.2 R28_1.1 R28_2.1 U1.12 U1.18 U1.31 U1.47 U1.63 U2.1 U3_1.2 U3_1.8 U3_2.2 U3_2.8 U4.3 U4.4 U4.5 | length 1.7
  Top Layer w0.25: v1(154.2,69.4) 154.46,69.14 U1.47
  other v1: 173.3,69.673 173.3,70.893 173.3,72.113 165.7,74.1 165.3,79.6 151.7,92.2 156.6,92.2 164.6,92.3 169.1,92.6
GND_CAN1: C15_1.1 C16_1.1 C19_1.2 D9_1.3 J2.4 R28_1.2 U3_1.9 U3_1.10 U3_1.15 | length 62.6
  Top Layer w0.3: D9_1.3 v1(122,70.95)
  Top Layer w0.5: J2.4@66.523,67.187 70.81,62.9 120.76,62.9 v2(123.9,66.04)
  other v2: 123.9,75.93
GND_CAN2: C15_2.1 C16_2.1 C19_2.2 D9_2.3 J2.8 R28_2.2 U3_2.9 U3_2.10 U3_2.15 | length 65.5
  Top Layer w0.3: J2.8@66.71,51.5 67.542,52.333 J2.8@68.16,52.95 ; D9_2.3 v1(121.75,52.2)
  Top Layer w0.5: J2.8 67.25,52.75 75.6,44.4 120.76,44.4 v2(123.65,47.29)
  other v2: 123.65,57.18
Green1: R8.1 U1.3 | length 52.1
  Top Layer w0.25: U1.3@167.345,69.639 168.161,69.639 169.375,68.425 169.375,67.775 170.051,67.1 173.6,67.1 185.3,55.4 185.3,32.09 188.44,28.95 R8.1
Green2: R16.1 U1.8 | length 44.2
  Top Layer w0.25: U1.8 168.54,72.14 169.8,73.4 169.8,73.7 170.3,74.2 174.2,74.2 175.2,73.2 175.2,66.7 186.1,55.8 186.1,46.29 188.44,43.95 R16.1
Green3: R18.1 U1.10 | length 32.5
  Top Layer w0.25: U1.10@167.345,73.141 168.31,73.141 169.025,73.855 169.025,74.125 169.875,74.975 174.625,74.975 176,73.6 176,67.1 184.3,58.8 R18.1
Green4: R20.1 U1.14 | length 26.1
  Top Layer w0.25: U1.14 168.401,75.14 169.85,76.589 169.85,78.65 170.3,79.1 179.5,79.1 184.8,73.8 R20.1
Green5: R22.1 U1.16 | length 27.7
  Top Layer w0.25: U1.16 168.34,76.14 169.1,76.9 169.1,79.1 169.9,79.9 179.54,79.9 188.115,88.475 188.265,88.475 188.44,88.65 R22.1
Green6: R25.1 U1.61 | length 53.2
  Top Layer w0.25: U1.61 163.794,75.094 169.4,80.7 179.225,80.7 186.6,88.075 186.6,101.81 188.44,103.65 R25.1
NetC3_1: C3.1 U1.5 Y1.2 | length 7.7
  Top Layer w0.25: U1.5 168.36,70.64 169.9,69.1 171.216,69.1 Y1.2@171.323,68.993 ; Y1.2 C3.1
NetC4_1: C4.1 U1.6 Y1.1 | length 7.8
  Top Layer w0.25: U1.6@167.345,71.141 168.241,71.141 169.718,72.618 170.948,72.618 Y1.1@171.323,72.993 ; Y1.1 C4.1
NetD1_1: D1.1 R1.2 | length 3
  Top Layer w0.381: R1.2 D1.1
NetD1_3: D1.3 R8.2 | length 3
  Top Layer w0.381: D1.3 R8.2
NetD2_1: D2.1 R15.2 | length 3
  Top Layer w0.381: R15.2 D2.1
NetD2_3: D2.3 R16.2 | length 3
  Top Layer w0.381: D2.3 R16.2
NetD3_1: D3.1 R17.2 | length 3
  Top Layer w0.381: R17.2 D3.1
NetD3_3: D3.3 R18.2 | length 3
  Top Layer w0.381: D3.3 R18.2
NetD5_1: D5.1 R19.2 | length 3
  Top Layer w0.381: R19.2 D5.1
NetD5_3: D5.3 R20.2 | length 3
  Top Layer w0.381: D5.3 R20.2
NetD6_1: D6.1 J1.5 | length 3.7
  Top Layer w0.381: D6.1 156.35,57.33 J1.5
NetD7_1: D7.1 R21.2 | length 3
  Top Layer w0.381: R21.2 D7.1
NetD7_3: D7.3 R22.2 | length 3
  Top Layer w0.381: D7.3 R22.2
NetD8_1: D8.1 R24.2 | length 3
  Top Layer w0.381: R24.2 D8.1
NetD8_3: D8.3 R25.2 | length 3
  Top Layer w0.381: D8.3 R25.2
NetT1_1_2: T1_1.2 U3_1.13 | length 4.4
  Top Layer w0.3: T1_1.2 130.625,70.32 130.675,70.37 130.675,70.524 130.851,70.7 133.409,70.7 133.759,70.35 U3_1.13@134.435,70.35
NetT1_1_4: T1_1.4 U3_1.12 | length 4.5
  Top Layer w0.3: T1_1.4 130.625,71.62 130.675,71.57 130.675,71.376 130.851,71.2 133.409,71.2 133.678,71.468 133.678,71.482 133.816,71.62 U3_1.12@134.435,71.62
NetT1_2_2: T1_2.2 U3_2.13 | length 4.4
  Top Layer w0.3: T1_2.2 130.375,51.57 130.425,51.62 130.425,51.774 130.601,51.95 133.159,51.95 133.509,51.6 U3_2.13@134.185,51.6
NetT1_2_4: T1_2.4 U3_2.12 | length 4.5
  Top Layer w0.3: T1_2.4 130.375,52.87 130.425,52.82 130.425,52.626 130.601,52.45 133.159,52.45 133.428,52.718 133.428,52.732 133.566,52.87 U3_2.12@134.185,52.87
NRST: B1.2 C5.1 J1.2 U1.7 | length 31.6
  Top Layer w0.25: B1.2 161.289,62.611 164.04,59.86 164.04,57.68 163.9,57.54 J1.2 ; U1.7 166.72,71.64 166.597,71.517 166.565,71.517 165.7,70.652 165.7,68.6 168.4,65.9 C5.1 170.521,65.878 170.521,64.521 v1(170.5,64.5)
  Bottom Layer w0.25: J1.2 164.205,57.565 165.165,57.565 170.5,62.9 v1(170.5,64.5)
Red1: R1.1 U1.2 | length 61.3
  Top Layer w0.25: U1.2@167.345,69.139 168.061,69.139 169,68.2 169,67.4 169.7,66.7 173.4,66.7 184.9,55.2 184.9,22.89 188.44,19.35 R1.1
Red2: R15.1 U1.4 | length 47.2
  Top Layer w0.25: U1.4 168.26,70.14 169.806,68.594 169.806,68.094 170.4,67.5 173.8,67.5 185.7,55.6 185.7,37.09 188.44,34.35 R15.1
Red3: R17.1 U1.9 | length 39.3
  Top Layer w0.25: U1.9 168.44,72.64 169.4,73.6 169.4,73.9 170.1,74.6 174.4,74.6 175.6,73.4 175.6,66.9 186.5,56 186.5,51.29 188.44,49.35 R17.1
Red4: R19.1 U1.11 | length 30.4
  Top Layer w0.25: U1.11@167.345,73.641 168.241,73.641 168.65,74.05 168.65,74.32 169.73,75.4 174.8,75.4 176.4,73.8 176.4,67.3 179.5,64.2 R19.1
Red5: R21.1 U1.15 | length 24.1
  Top Layer w0.25: U1.15@167.345,75.641 168.371,75.641 169.475,76.745 169.475,78.875 170.1,79.5 179.7,79.5 180,79.2 R21.1
Red6: R24.1 U1.62 | length 43.3
  Top Layer w0.25: U1.62 164.294,74.894 169.7,80.3 179.4,80.3 187.4,88.3 187.4,93.01 188.44,94.05 R24.1
SWCLK: J1.3 U1.49 | length 11.9
  Top Layer w0.25: U1.49 157.794,64.894 156.6,63.7 156.6,62.033 161.233,57.4 J1.3
SWDIO: J1.4 U1.46 | length 15.6
  Top Layer w0.25: U1.46 156.86,69.64 157.4,69.1 157.4,68 155.8,66.4 155.8,60.56 J1.4
V1: J2.15 R2.1 | length 154.7
  Top Layer w0.5: J2.15 58.175,68.535 58.175,83.759 58.2,83.784 58.2,88.1 77.7,107.6 157.571,107.6 171.589,93.582 171.589,93.432 171.639,93.382 R2.1
V2: J2.14 R3.2 | length 144.2
  Top Layer w0.5: J2.14 63.15,66.75 59.3,70.6 59.3,87.575 78.225,106.5 154.249,106.5 167.167,93.582 167.167,93.432 167.217,93.382 R3.2
V3: J2.13 R4.2 | length 132.6
  Top Layer w0.5: J2.13 60.5,73.21 60.5,86.825 78.875,105.2 150.861,105.2 162.679,93.382 R4.2@162.829,93.382
V4: J2.12 R5.2 | length 122.3
  Top Layer w0.5: J2.12 61.5,75.71 61.5,85.925 79.675,104.1 147.994,104.1 158.512,93.582 158.512,93.432 158.562,93.382 R5.2@158.712,93.382
V5: J2.11 R6.2 | length 105.5
  Top Layer w0.5: J2.11 89.11,102.9 144.678,102.9 153.996,93.582 153.996,93.432 154.046,93.382 154.196,93.382 R6.2@154.096,93.482
Viso_1: C15_1.2 C16_1.2 U3_1.11 U3_1.16 | length 17
  Top Layer w0.3: C16_1.2 C15_1.2 U3_1.16 136.21,66.54 137,67.33 137,72.25 136.36,72.89 U3_1.11
Viso_2: C15_2.2 C16_2.2 U3_2.11 U3_2.16 | length 17
  Top Layer w0.3: C16_2.2 C15_2.2 U3_2.16 135.96,47.79 136.75,48.58 136.75,53.5 136.11,54.14 U3_2.11
Volt1: C14.2 R2.2 R9.2 U1.20 | length 22
  Top Layer w0.25: U1.20 163.794,82.694 167.7,86.6 171.8,86.6 172.9,87.7 172.9,89.572 ; R2.2@171.775,91.822 171.775,89.572 172.9,89.572 ; C14.2 172.9,89.572
Volt2: C24.2 R3.1 R10.2 U1.21 | length 18
  Top Layer w0.25: U1.21 163.294,82.835 168.6,88.141 168.6,89.572 ; R3.1 R10.2 168.3,89.572 168.6,89.572 ; C24.2 168.6,89.572
Volt3: C25.2 R4.1 R11.2 U1.22 | length 16.3
  Top Layer w0.25: U1.22 162.794,82.994 163.972,84.172 163.972,89.572 C25.2 ; R4.1 R11.2 163.9,89.572
Volt4: C26.2 R5.1 R12.2 U1.23 | length 17
  Top Layer w0.25: R5.1 R12.2 159.6,89.572 ; C26.2 159.6,89.572 ; U1.23 162.294,78.814 162.296,78.816 162.296,82.904 159.6,85.6 159.6,89.572
Volt5: C27.2 R6.1 R13.2 U1.24 | length 18.3
  Top Layer w0.25: R13.2 154.101,91.727 R6.1@154.196,91.822 ; R13.2@154.3,89.526 155.1,89.526 ; C27.2@156.074,89.526 155.1,89.526 ; C27.2@156.162,89.572 C27.2 ; U1.24 161.794,80.806 155.1,87.5 155.1,89.526
Volt6: C28.2 R7.1 R14.2 U1.25 | length 22
  Top Layer w0.25: R14.2 R7.1 ; R14.2@150.004,89.572 150.8,89.572 ; C28.2 150.8,89.572 ; U1.25 161.294,80.606 154.8,87.1 151.2,87.1 150.8,87.5 150.8,89.572
pads on no net: J2.16 J2.17 J2.18 J2.19 J2.B U1.1 U1.17 U1.26 U1.27 U1.28 U1.29 U1.30 U1.35 U1.36 U1.37 U1.38 U1.39 U1.40 U1.41 U1.42 U1.43 U1.50 U1.51 U1.52 U1.53 U1.54 U1.55 U1.56 U1.57 U1.58 U1.59 U3_1. U3_1.4 U3_1.6 U3_1.7 U3_1.14 U3_2. U3_2.4 U3_2.6 U3_2.7 U3_2.14 U4.2 U4.6

## Polygon pours and split planes (outlines as drawn)
GND on Top Layer "GND_L01_P016" (solid, pour order 16): 57,13 57,110 cw(c61,110) 61,114 201,114 cw(c201,110) 205,110 205,13 cw(c201,13) 201,9 61,9 cw(c61,13)
GND_CAN1 on Top Layer "NONET_L-01_P-001" (solid, pour order 15): 138,64.25 139.25,65.5 139.25,76.75 138,78 117,78 115.75,76.75 115.75,65.5 117,64.25
GND_CAN2 on Top Layer "NONET_L-01_P-001" (solid, pour order 13): 137.75,45.5 139,46.75 139,58 137.75,59.25 116.75,59.25 115.5,58 115.5,46.75 116.75,45.5
GND on Bottom Layer "GND_L02_P014" (solid, pour order 14): 57,13 57,110 cw(c61,110) 61,114 201,114 cw(c201,110) 205,110 205,13 cw(c201,13) 201,9 61,9 cw(c61,13)
GND_CAN2 on Bottom Layer "NONET_L-01_P-001" (solid, pour order 12): 137.75,45.5 139,46.75 139,58 137.75,59.25 116.75,59.25 115.5,58 115.5,46.75 116.75,45.5
GND_CAN1 on Bottom Layer "NONET_L-01_P-001" (solid, pour order 11): 138,64.25 139.25,65.5 139.25,76.75 138,78 117,78 115.75,76.75 115.75,65.5 117,64.25

## Silkscreen, mask and mechanical layers (free items; w line width, h text height)
Top Overlay:
  text "CAN1" at 136.476,62.9 h1.5
  text "GND" at 167.45,51.3 h1.5 r90
  text "NRST" at 164.95,49.8 h1.5 r90
  text "+3,3v" at 156.95,48.3 h1.5 r90
  text "SWDIO" at 159.7,48.3 h1.5 r90
  text "SWCLK" at 162.2,48.3 h1.5 r90
  text "CAN2" at 136.226,44.2 h1.5
  text "ЦПТ ТМХ / ИРА / Версия 1" at 140.795,20.85 h7
Mechanical 1:
  the board outline again, w0.254

## Text inside footprints (layer, text, board x,y; h text height)
D1: Top Overlay "" at 193.25,19.75 h1 r90; Top Overlay "R" at 192.483,21.718 h1 r90; Top Overlay "C" at 192.489,23.569 h1 r90; Top Overlay "G" at 192.489,25.348 h1 r90
D2: Top Overlay "" at 193.25,34.75 h1 r90; Top Overlay "R" at 192.483,36.718 h1 r90; Top Overlay "C" at 192.489,38.569 h1 r90; Top Overlay "G" at 192.489,40.348 h1 r90
D3: Top Overlay "" at 193.25,49.75 h1 r90; Top Overlay "R" at 192.483,51.718 h1 r90; Top Overlay "C" at 192.489,53.569 h1 r90; Top Overlay "G" at 192.489,55.348 h1 r90
D5: Top Overlay "" at 193.25,64.75 h1 r90; Top Overlay "R" at 192.483,66.718 h1 r90; Top Overlay "C" at 192.489,68.569 h1 r90; Top Overlay "G" at 192.489,70.348 h1 r90
D7: Top Overlay "" at 193.25,79.75 h1 r90; Top Overlay "R" at 192.483,81.718 h1 r90; Top Overlay "C" at 192.489,83.569 h1 r90; Top Overlay "G" at 192.489,85.348 h1 r90
D8: Top Overlay "" at 193.25,94.75 h1 r90; Top Overlay "R" at 192.483,96.718 h1 r90; Top Overlay "C" at 192.489,98.569 h1 r90; Top Overlay "G" at 192.489,100.348 h1 r90